# EAGLE board WS2812-Breakout-v1-panelized (EAGLE 5.12)
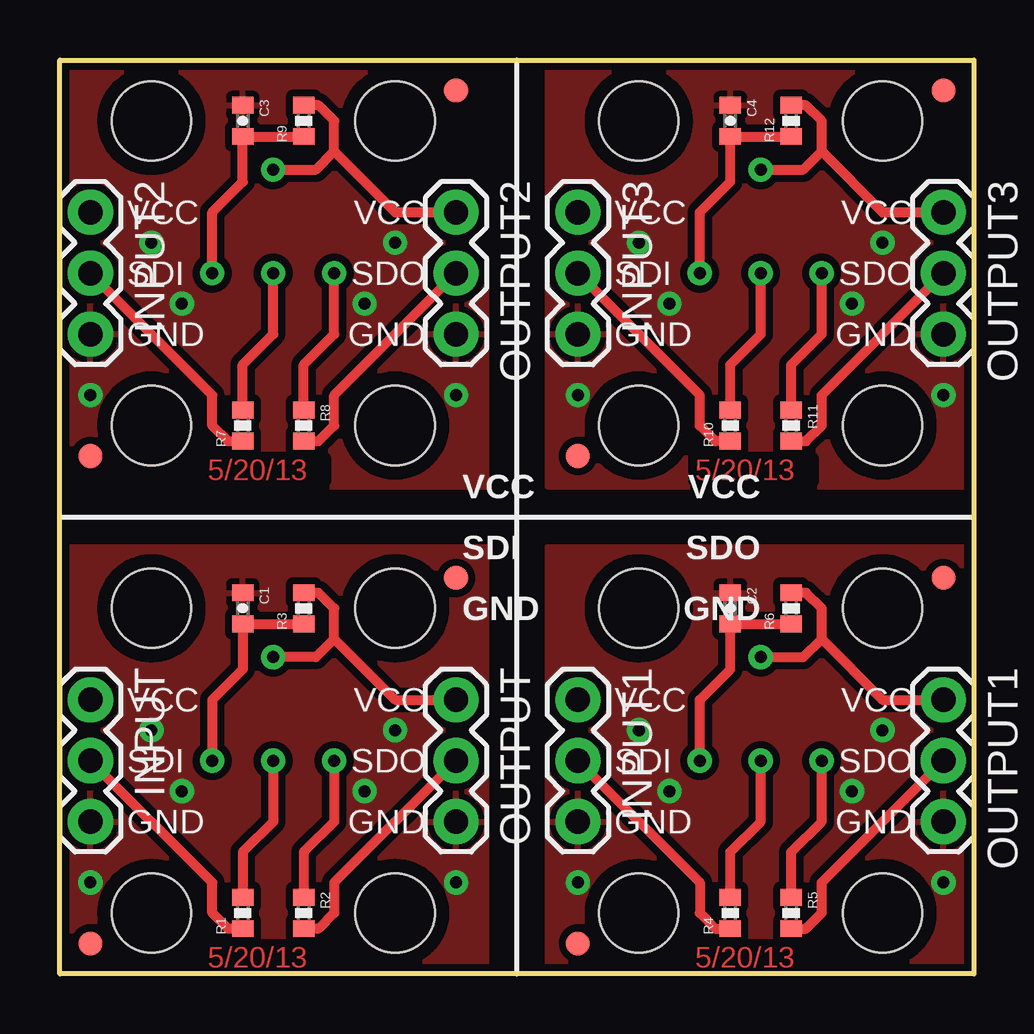
[diagram p0: board, top side]
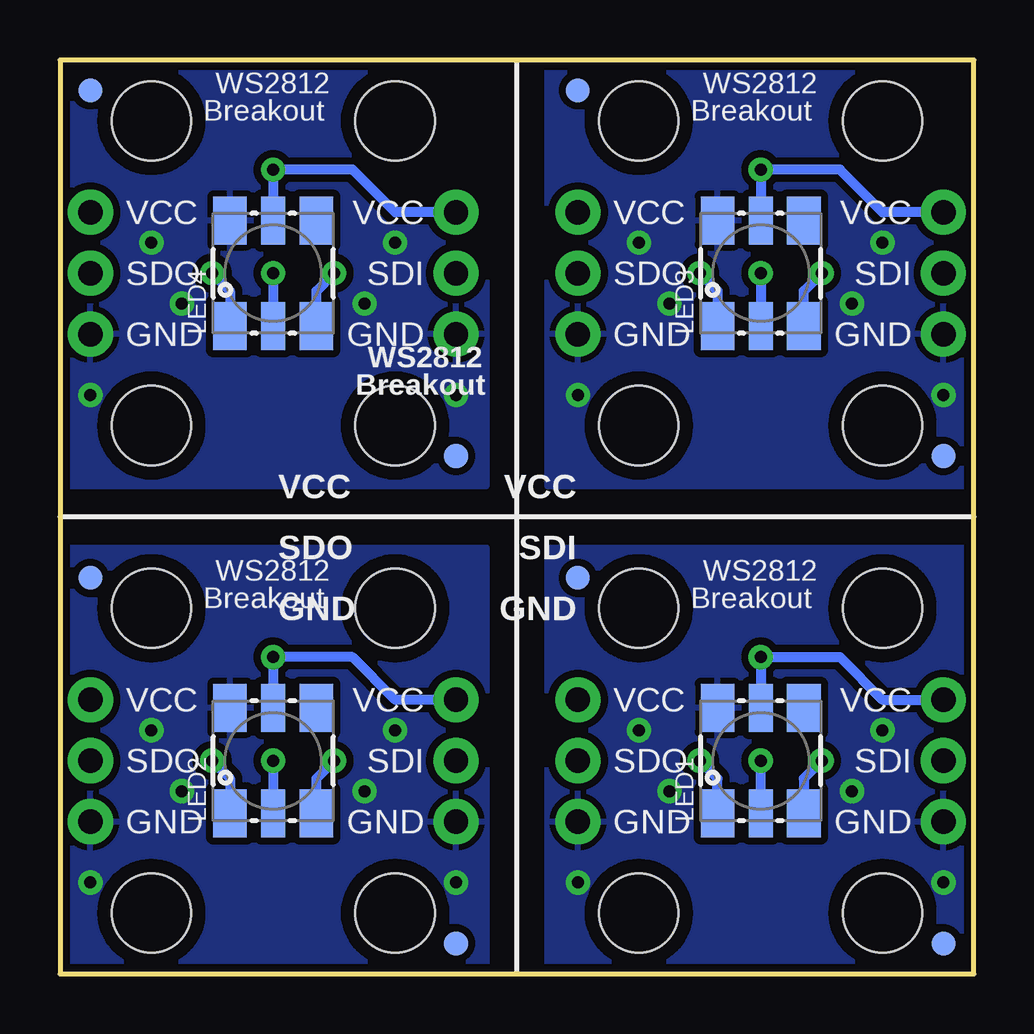
[diagram p1: board, bottom side, seen from below]

Size 38.1 x 38.1 mm. Coordinates in mm from the lower left corner, seen from the top.
Outline: 38.1,0 0,0 0,38.1 38.1,38.1 38.1,0
Copper layers (1*16): Top 0.035mm / dielectric 1.5mm / Bottom 0.035mm
Design rules "SparkFun *": minimum track width 8mil, minimum drill 20mil, track to track 8mil, track to pad 8mil, pad to pad 8mil, via to via 8mil, smd to smd 8mil, copper to edge 8mil, drill to drill 8mil, minimum pad ring 12mil, minimum via ring 10mil, stop-mask expansion 4mil, vias tented up to drill 20mil, thermal gap 10mil

## Footprints (pad centres in the part's own frame; a part is rotated, then mirrored left to right if it is on the bottom)
0402-CAP = smd 0.7 x 0.9: 1 -0.65,0; 2 0.65,0
1X03 = drill 1.016 pad 1.88 round: 1 0,0; 2 2.54,0; 3 5.08,0
STAND-OFF = hole 3.302: 0,0
FIDUCIAL-1X2 = smd 1 x 1: 1 0,0
LED-TRICOLOR-5050 = smd 2 x 1.4: 1 -2.2,1.8; 3 -2.2,-1.8; 4 2.2,-1.8; 6 2.2,1.8 | smd 2 x 1: 2 -2.2,0; 5 2.2,0
0402-RES = smd 0.7 x 0.9: 1 -0.65,0; 2 0.65,0

## Placement (x,y rotation side)
C1  0.1uF  [0402-CAP]  7.62,15.24 270 top
C2  0.1uF  [0402-CAP]  27.94,15.24 270 top
C3  0.1uF  [0402-CAP]  7.62,35.56 270 top
C4  0.1uF  [0402-CAP]  27.94,35.56 270 top
INPUT  [1X03]  1.27,11.43 270 top
INPUT1  [1X03]  21.59,11.43 270 top
INPUT2  [1X03]  1.27,31.75 270 top
INPUT3  [1X03]  21.59,31.75 270 top
JP1  STAND-OFF  [STAND-OFF]  13.97,15.24 0 top
JP2  STAND-OFF  [STAND-OFF]  3.81,2.54 0 top
JP3  STAND-OFF  [STAND-OFF]  34.29,15.24 0 top
JP4  STAND-OFF  [STAND-OFF]  3.81,15.24 0 top
JP5  STAND-OFF  [STAND-OFF]  13.97,2.54 0 top
JP6  FIDUCIAL1X2  [FIDUCIAL-1X2]  16.51,16.51 0 top
JP7  FIDUCIAL1X2  [FIDUCIAL-1X2]  1.27,1.27 0 top
JP8  FIDUCIAL1X2  [FIDUCIAL-1X2]  1.27,1.27 0 bottom
JP9  FIDUCIAL1X2  [FIDUCIAL-1X2]  16.51,16.51 0 bottom
JP10  STAND-OFF  [STAND-OFF]  24.13,2.54 0 top
JP11  STAND-OFF  [STAND-OFF]  24.13,15.24 0 top
JP12  STAND-OFF  [STAND-OFF]  34.29,2.54 0 top
JP13  FIDUCIAL1X2  [FIDUCIAL-1X2]  36.83,16.51 0 top
JP14  FIDUCIAL1X2  [FIDUCIAL-1X2]  21.59,1.27 0 top
JP15  FIDUCIAL1X2  [FIDUCIAL-1X2]  21.59,1.27 0 bottom
JP16  FIDUCIAL1X2  [FIDUCIAL-1X2]  36.83,16.51 0 bottom
JP17  STAND-OFF  [STAND-OFF]  13.97,35.56 0 top
JP18  STAND-OFF  [STAND-OFF]  3.81,22.86 0 top
JP19  STAND-OFF  [STAND-OFF]  3.81,35.56 0 top
JP20  STAND-OFF  [STAND-OFF]  13.97,22.86 0 top
JP21  FIDUCIAL1X2  [FIDUCIAL-1X2]  16.51,36.83 0 top
JP22  FIDUCIAL1X2  [FIDUCIAL-1X2]  1.27,21.59 0 top
JP23  FIDUCIAL1X2  [FIDUCIAL-1X2]  1.27,21.59 0 bottom
JP24  FIDUCIAL1X2  [FIDUCIAL-1X2]  16.51,36.83 0 bottom
JP25  STAND-OFF  [STAND-OFF]  34.29,35.56 0 top
JP26  STAND-OFF  [STAND-OFF]  24.13,22.86 0 top
JP27  STAND-OFF  [STAND-OFF]  24.13,35.56 0 top
JP28  STAND-OFF  [STAND-OFF]  34.29,22.86 0 top
JP29  FIDUCIAL1X2  [FIDUCIAL-1X2]  36.83,36.83 0 top
JP30  FIDUCIAL1X2  [FIDUCIAL-1X2]  21.59,21.59 0 top
JP31  FIDUCIAL1X2  [FIDUCIAL-1X2]  21.59,21.59 0 bottom
JP32  FIDUCIAL1X2  [FIDUCIAL-1X2]  36.83,36.83 0 bottom
LED1  WS2812  [LED-TRICOLOR-5050]  8.89,8.89 90 bottom
LED2  WS2812  [LED-TRICOLOR-5050]  29.21,8.89 90 bottom
LED3  WS2812  [LED-TRICOLOR-5050]  8.89,29.21 90 bottom
LED4  WS2812  [LED-TRICOLOR-5050]  29.21,29.21 90 bottom
OUTPUT  [1X03]  16.51,11.43 270 top
OUTPUT1  [1X03]  36.83,11.43 270 top
OUTPUT2  [1X03]  16.51,31.75 270 top
OUTPUT3  [1X03]  36.83,31.75 270 top
R1  27  [0402-RES]  7.62,2.54 90 top
R2  27  [0402-RES]  10.16,2.54 270 top
R3  1k  [0402-RES]  10.16,15.24 90 top
R4  27  [0402-RES]  27.94,2.54 90 top
R5  27  [0402-RES]  30.48,2.54 270 top
R6  1k  [0402-RES]  30.48,15.24 90 top
R7  27  [0402-RES]  7.62,22.86 90 top
R8  27  [0402-RES]  10.16,22.86 270 top
R9  1k  [0402-RES]  10.16,35.56 90 top
R10  27  [0402-RES]  27.94,22.86 90 top
R11  27  [0402-RES]  30.48,22.86 270 top
R12  1k  [0402-RES]  30.48,35.56 90 top
U$1  CREATIVE_COMMONS  [CREATIVE_COMMONS]  0,0 0 top

## Library data of the parts
C1-C4 INPUT INPUT1-INPUT3 JP1-JP32 OUTPUT OUTPUT1-OUTPUT3 R1-R12 U$1 = SparkFun
LED1-LED4 = rbg-worldsemi-led

## Nets
GND: C1.1 INPUT.3 LED1.6 OUTPUT.3
GND1: C2.1 INPUT1.3 LED2.6 OUTPUT1.3
GND2: C3.1 INPUT2.3 LED3.6 OUTPUT2.3
GND3: C4.1 INPUT3.3 LED4.6 OUTPUT3.3
N$1: LED1.2 R1.2
N$2: LED1.1 R2.1
N$3: C1.2 LED1.3 R3.1
N$4: LED2.2 R4.2
N$5: LED2.1 R5.1
N$6: C2.2 LED2.3 R6.1
N$7: LED3.2 R7.2
N$8: LED3.1 R8.1
N$9: C3.2 LED3.3 R9.1
N$10: LED4.2 R10.2
N$11: LED4.1 R11.1
N$12: C4.2 LED4.3 R12.1
SDI: INPUT.2 R1.1
SDI1: INPUT1.2 R4.1
SDI2: INPUT2.2 R7.1
SDI3: INPUT3.2 R10.1
SDO: OUTPUT.2 R2.2
SDO1: OUTPUT1.2 R5.2
SDO2: OUTPUT2.2 R8.2
SDO3: OUTPUT3.2 R11.2
VCC: INPUT.1 LED1.5 OUTPUT.1 R3.2
VCC1: INPUT1.1 LED2.5 OUTPUT1.1 R6.2
VCC2: INPUT2.1 LED3.5 OUTPUT2.1 R9.2
VCC3: INPUT3.1 LED4.5 OUTPUT3.1 R12.2

## Tracks (layer width: path | path; a pad name or v marks a point on that pad's centre or on a via)
GND  (via drill 0.5)
  other vias: 3.81,10.16 13.97,10.16 1.27,3.81 16.51,3.81 5.08,7.62 12.7,7.62
  pour Top (isolate 0.305): 0,17.78 0,0 17.78,0 17.78,17.78
  pour Bottom (isolate 0.305): 0,17.78 0,0 17.78,0 17.78,17.78
GND1  (via drill 0.5)
  other vias: 24.13,10.16 34.29,10.16 21.59,3.81 36.83,3.81 25.4,7.62 33.02,7.62
  pour Top (isolate 0.305): 20.32,17.78 20.32,0 38.1,0 38.1,17.78
  pour Bottom (isolate 0.305): 20.32,17.78 20.32,0 38.1,0 38.1,17.78
GND2  (via drill 0.5)
  other vias: 3.81,30.48 13.97,30.48 1.27,24.13 16.51,24.13 5.08,27.94 12.7,27.94
  pour Top (isolate 0.305): 0,38.1 0,20.32 17.78,20.32 17.78,38.1
  pour Bottom (isolate 0.305): 0,38.1 0,20.32 17.78,20.32 17.78,38.1
GND3  (via drill 0.5)
  other vias: 24.13,30.48 34.29,30.48 21.59,24.13 36.83,24.13 25.4,27.94 33.02,27.94
  pour Top (isolate 0.305): 20.32,38.1 20.32,20.32 38.1,20.32 38.1,38.1
  pour Bottom (isolate 0.305): 20.32,38.1 20.32,20.32 38.1,20.32 38.1,38.1
N$1  (via drill 0.5)
  Top 0.406: v8.89,8.89 8.89,6.35 7.62,5.08 R1.2
  Bottom 0.406: LED1.2 v8.89,8.89
N$2  (via drill 0.5)
  Top 0.406: v11.43,8.89 11.43,6.35 10.16,5.08 R2.1
  Bottom 0.406: LED1.1 10.69,8.15 v11.43,8.89
N$3  (via drill 0.5)
  Top 0.406: R3.1 C1.2 7.62,12.7 6.35,11.43 v6.35,8.89
  Bottom 0.406: LED1.3 7.09,8.15 v6.35,8.89
N$4  (via drill 0.5)
  Top 0.406: v29.21,8.89 29.21,6.35 27.94,5.08 R4.2
  Bottom 0.406: v29.21,8.89 LED2.2
N$5  (via drill 0.5)
  Top 0.406: v31.75,8.89 31.75,6.35 30.48,5.08 R5.1
  Bottom 0.406: LED2.1 31.01,8.15 v31.75,8.89
N$6  (via drill 0.5)
  Top 0.406: R6.1 C2.2 27.94,12.7 26.67,11.43 v26.67,8.89
  Bottom 0.406: LED2.3 27.41,8.15 v26.67,8.89
N$7  (via drill 0.5)
  Top 0.406: v8.89,29.21 8.89,26.67 7.62,25.4 R7.2
  Bottom 0.406: v8.89,29.21 LED3.2
N$8  (via drill 0.5)
  Top 0.406: v11.43,29.21 11.43,26.67 10.16,25.4 R8.1
  Bottom 0.406: LED3.1 10.69,28.47 v11.43,29.21
N$9  (via drill 0.5)
  Top 0.406: R9.1 C3.2 7.62,33.02 6.35,31.75 v6.35,29.21
  Bottom 0.406: LED3.3 7.09,28.47 v6.35,29.21
N$10  (via drill 0.5)
  Top 0.406: v29.21,29.21 29.21,26.67 27.94,25.4 R10.2
  Bottom 0.406: v29.21,29.21 LED4.2
N$11  (via drill 0.5)
  Top 0.406: v31.75,29.21 31.75,26.67 30.48,25.4 R11.1
  Bottom 0.406: LED4.1 31.01,28.47 v31.75,29.21
N$12  (via drill 0.5)
  Top 0.406: R12.1 C4.2 27.94,33.02 26.67,31.75 v26.67,29.21
  Bottom 0.406: LED4.3 27.41,28.47 v26.67,29.21
SDI
  Top 0.406: R1.1 7,1.89 6.35,2.54 6.35,3.81 INPUT.2
SDI1
  Top 0.406: R4.1 27.32,1.89 26.67,2.54 26.67,3.81 INPUT1.2
SDI2
  Top 0.406: R7.1 7,22.21 6.35,22.86 6.35,24.13 INPUT2.2
SDI3
  Top 0.406: R10.1 27.32,22.21 26.67,22.86 26.67,24.13 INPUT3.2
SDO
  Top 0.406: R2.2 10.78,1.89 11.43,2.54 11.43,3.81 OUTPUT.2
SDO1
  Top 0.406: R5.2 31.1,1.89 31.75,2.54 31.75,3.81 OUTPUT1.2
SDO2
  Top 0.406: R8.2 10.78,22.21 11.43,22.86 11.43,24.13 OUTPUT2.2
SDO3
  Top 0.406: R11.2 31.1,22.21 31.75,22.86 31.75,24.13 OUTPUT3.2
VCC  (via drill 0.5)
  Top 0.406: R3.2 10.78,15.89 11.43,15.24 11.43,13.97 | 11.43,13.97 13.97,11.43 OUTPUT.1 | v8.89,13.21 10.67,13.21 11.43,13.97
  Bottom 0.406: LED1.5 v8.89,13.21 5.59,13.21 3.81,11.43 INPUT.1
VCC1  (via drill 0.5)
  Top 0.406: R6.2 31.1,15.89 31.75,15.24 31.75,13.97 | 31.75,13.97 34.29,11.43 OUTPUT1.1 | v29.21,13.21 30.99,13.21 31.75,13.97
  Bottom 0.406: LED2.5 v29.21,13.21 25.91,13.21 24.13,11.43 INPUT1.1
VCC2  (via drill 0.5)
  Top 0.406: R9.2 10.78,36.21 11.43,35.56 11.43,34.29 | 11.43,34.29 13.97,31.75 OUTPUT2.1 | v8.89,33.53 10.67,33.53 11.43,34.29
  Bottom 0.406: LED3.5 v8.89,33.53 5.59,33.53 3.81,31.75 INPUT2.1
VCC3  (via drill 0.5)
  Top 0.406: R12.2 31.1,36.21 31.75,35.56 31.75,34.29 | 31.75,34.29 34.29,31.75 OUTPUT3.1 | v29.21,33.53 30.99,33.53 31.75,34.29
  Bottom 0.406: LED4.5 v29.21,33.53 25.91,33.53 24.13,31.75 INPUT3.1

## Text on the board
Top: 5/20/13 | 5/20/13 | 5/20/13 | 5/20/13
tPlace: VCC | VCC | SDO | SDI | GND | GND
bPlace: WS2812 | Breakout | VCC | VCC | SDI | SDO | GND | GND
_tsilk: VCC | VCC | VCC | VCC | SDO | SDO | SDI | SDI | GND | GND | GND | GND | VCC | VCC | VCC | VCC | SDO | SDO | SDI | SDI | GND | GND | GND | GND
_bsilk: WS2812 | WS2812 | Breakout | Breakout | VCC | VCC | VCC | VCC | SDI | SDI | SDO | SDO | GND | GND | GND | GND | WS2812 | WS2812 | Breakout | Breakout | VCC | VCC | VCC | VCC | SDI | SDI | SDO | SDO | GND | GND | GND | GND